# Altium PCB PCB.PcbDoc (part 2 of 2)
Units mil, origin at the board's own origin, x right, y up, seen from the top; angles counter-clockwise.
Board outline 3500 x 2500 mil, 4 copper layers (Layer 1, Layer 2, Layer 3, Layer 4), stack 61.3 mil thick; 75 components, 48 nets, 305 pads, 283 vias.
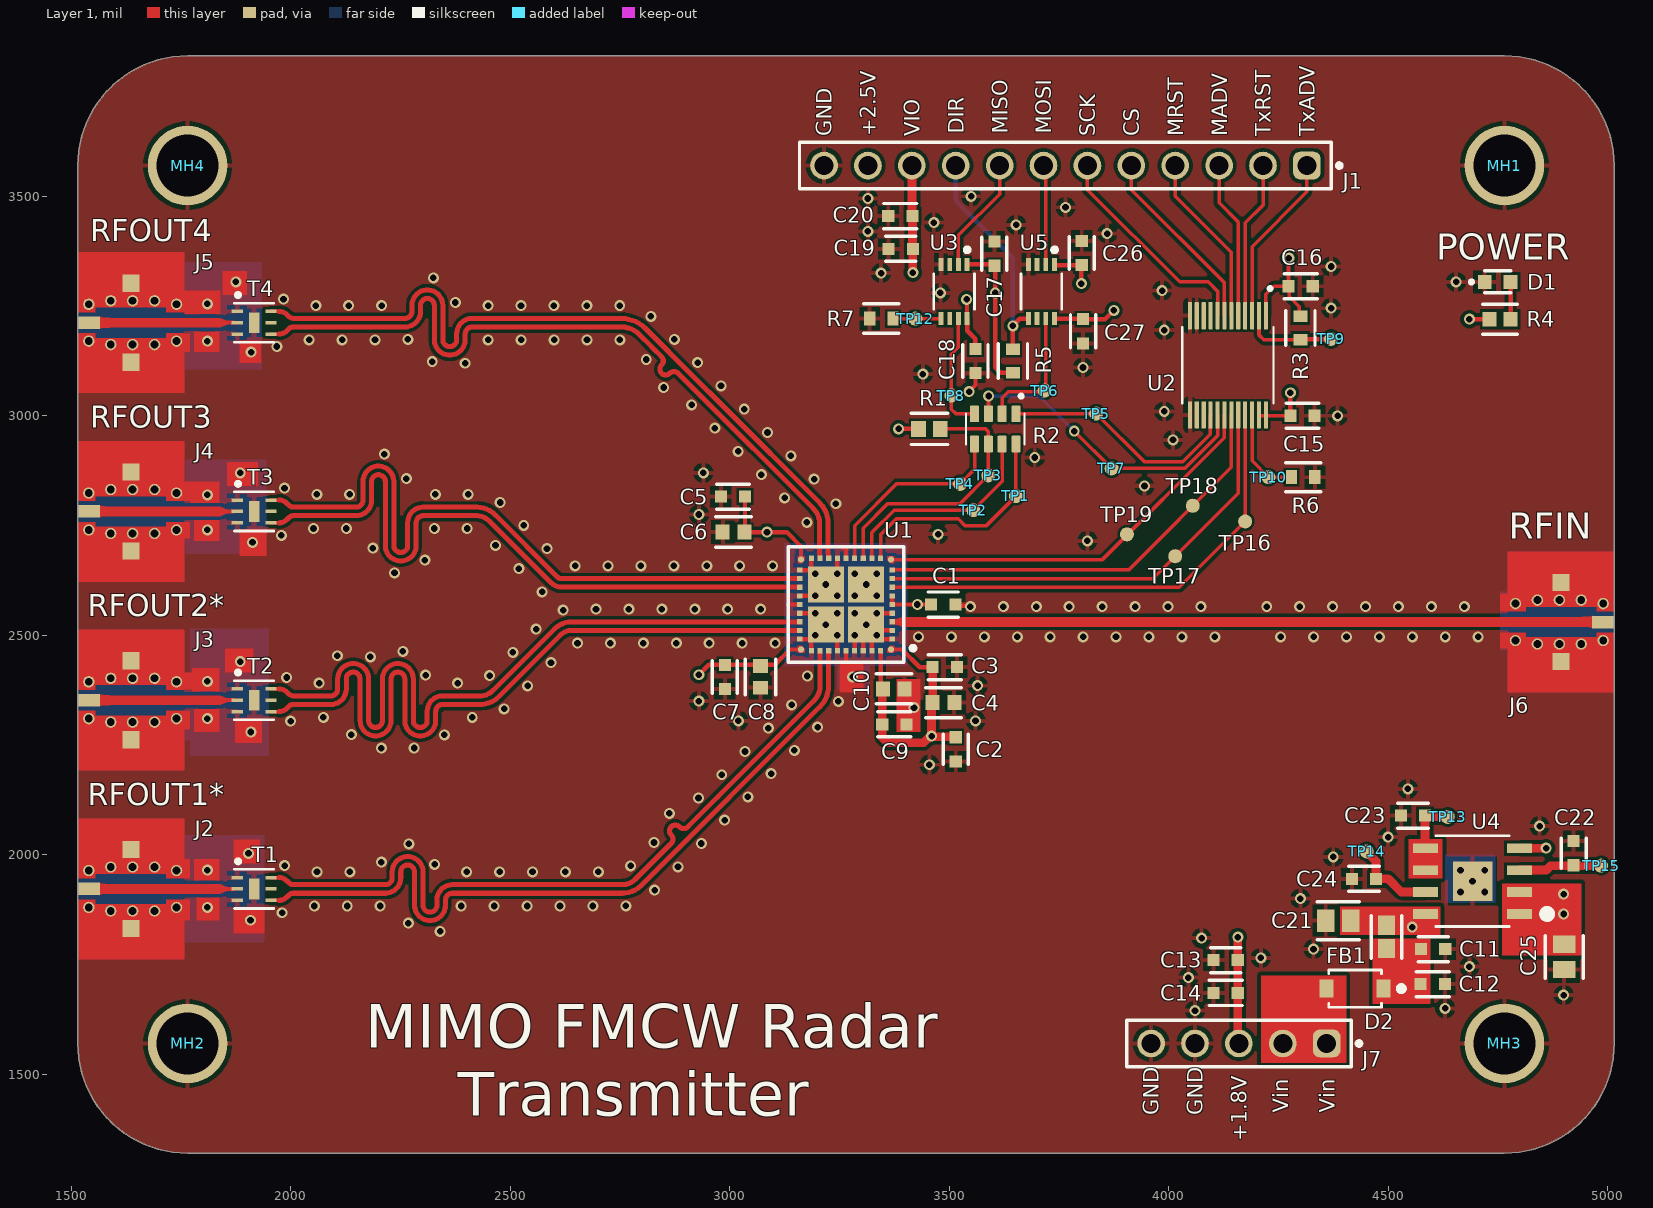
[diagram p0: Layer 1 view]

## Polygon pours and split planes (outlines as drawn) (continued)
+2.5 on Layer 3 "+2.5_L03_P002" (solid, remove dead copper, pour order 2): 1515,1570 1515,3570 cw(c1765,3570) 1765,3820 4765,3820 cw(c4765,3570) 5015,3570 5015,1570 cw(c4765,1570) 4765,1320 1765,1320 cw(c1765,1570)
GND on Layer 1 "GND_L01_P000" (solid, remove dead copper, pour order 0): 1515,1570 1515,3570 cw(c1765,3570) 1765,3820 4765,3820 cw(c4765,3570) 5015,3570 5015,1570 cw(c4765,1570) 4765,1320 1765,1320 cw(c1765,1570)

## Other copper
Layer 1:
  rectangle net GND: 3250,2370 3305,2435
  rectangle net GND: 1845,3275 1900,3330
  rectangle net GND: 1883,3120 1932.28,3172
  rectangle net GND: 1855,2840 1925,2895
  rectangle net GND: 1883,2680 1945,2742
  rectangle net GND: 1850,2415 1915,2470
  rectangle net GND: 1873,2255 1935,2312
  rectangle net GND: 1870,1980 1930,2035
  rectangle net GND: 1870,1820 1940,1875
  rectangle net GND: 1770,2801.65 1838,2850
  rectangle net GND: 1780,2715 1838,2762.35
  rectangle net GND: 1775,2371.65 1838,2425
  rectangle net GND: 1780,2280 1838,2332.35
  rectangle net GND: 1780,1941.65 1838,1990
  rectangle net GND: 1785,1850 1838,1902.35
  rectangle net GND: 1758.57,3231.65 1840,3285
  rectangle net GND: 1780,3145 1838,3192.35
  rectangle net VinF: 4390,1816.94 4619.77,1882
  rectangle net GND: 3380,2280 3435,2400
  rectangle net +2.5: 4760,1770 4940,1935
  rectangle net Vin: 4210,1525 4405,1725
  rectangle net GND: 4755,2554.25 4813,2595
  rectangle net GND: 4755,2470 4813,2505.75
  rectangle net GND: 1717,3145 1770,3187.75
  rectangle net GND: 1717,3236.25 1770,3276.76
  rectangle net GND: 1717,2806.25 1770,2850
  rectangle net GND: 1717,2720 1770,2757.75
  rectangle net GND: 1717,2376.25 1780,2415
  rectangle net GND: 1717,1850 1770,1897.75
  rectangle net GND: 1717,2285 1770,2327.75
  rectangle net GND: 1717,1946.25 1770,1990
  rectangle net NetC23_1: 4546.23,1946 4623.77,2036
  rectangle net NetC11_2: 4465,1659.5 4596.34,1808.78
Layer 2:
  rectangle net GND: 3250,2370 3310,2440
  rectangle net GND: 1780,1795 1940,2040
  rectangle net GND: 1775,2220 1945,2500
  rectangle net GND: 1775,2650 1960,2915
  rectangle net GND: 1780,3100 1940,3355
  rectangle net GND: 4755,2440 5015,2625
  rectangle net GND: 4635,1885 4750,1995
  rectangle net GND: 1515,3120 1765,3300
  rectangle net GND: 1515,2685 1780,2875
  rectangle net GND: 3125,2430 3405,2710
  rectangle net GND: 1515,2270 1770,2470
  rectangle net GND: 1515,1840 1775,2005
Layer 3:
  rectangle net +2.5: 4870,1820 4940,1940
Layer 4:
  rectangle net GND: 1735,3105 1935,3350
  rectangle net GND: 1760,2685 1945,2900
  rectangle net GND: 1750,1800 1940,2045
  rectangle net GND: 1770,2225 1950,2515
  rectangle net GND: 3245,2375 3320,2440
  rectangle net GND: 3125,2430 3405,2710
  rectangle net GND: 4755,2465.24 4795,2600
  rectangle net GND: 4630,1890 4745,2000
  rectangle net GND: 1740,3140 1775,3270
  rectangle net GND: 1740,2710 1785,2840
  rectangle net GND: 1745,2260 1790,2416.76
  rectangle net GND: 1735,1830 1790,1986.76

## Silkscreen, mask and mechanical layers (free items; w line width, h text height)
Top Overlay:
  text "DIR" at 3533,3642 h35 r90
  text "MISO" at 3633,3642 h35 r90
  text "MOSI" at 3733,3642 h35 r90
  text "GND" at 3233,3637 h35 r90
  text "+2.5V" at 3333,3637 h35 r90
  text "VIO" at 3433,3637 h35 r90
  text "SCK" at 3833,3637 h35 r90
  text "CS" at 3933,3637 h35 r90
  text "MRST" at 4033,3637 h35 r90
  text "MADV" at 4133,3637 h35 r90
  text "TxRST" at 4233,3637 h35 r90
  text "TxADV" at 4333,3637 h35 r90
  text "RFOUT4" at 1543,3398 h50
  text "POWER" at 4610,3355 h60
  text "RFOUT3" at 1543,2973 h50
  text "RFIN" at 4775,2720 h60
  text "RFOUT2*" at 1538,2543 h50
  text "RFOUT1*" at 1538,2113 h50
  text "MIMO FMCW Radar" at 2170,1560 h100
  text "Vin" at 4273,1412 h35 r90
  text "Vin" at 4378,1412 h35 r90
  text "GND" at 3978,1407 h35 r90
  text "GND" at 4078,1407 h35 r90
  text "Transmitter" at 2380,1405 h100
  text "+1.8V" at 4178,1347 h35 r90
Bottom Overlay:
  text "GND" at 3197,3627 h35 r270
  text "+2.5V" at 3297,3622 h35 r270
  text "VIO" at 3397,3622 h35 r270
  text "DIR" at 3502,3622 h35 r270
  text "SDO" at 3597,3622 h35 r270
  text "SDIO" at 3697,3622 h35 r270
  text "SCK" at 3802,3622 h35 r270
  text "CS" at 3897,3622 h35 r270
  text "MRST" at 3997,3622 h35 r270
  text "MADV" at 4102,3622 h35 r270
  text "TxRST" at 4197,3622 h35 r270
  text "TxADV" at 4297,3622 h35 r270
  text "RFOUT4" at 1783,3073 h50 r270
  text "RFOUT3" at 1783,2643 h50 r270
  text "MIMO FMCW Radar Transmitter" at 4555,2465 h100
  text "RFIN" at 4680,2420 h60 r270
  text "RFOUT2*" at 1783,2188 h50 r270
  text "RFOUT1*" at 1778,1763 h50 r270
  text "Vin" at 4247,1427 h35 r270
  text "Vin" at 4347,1427 h35 r270
  text "GND" at 3942,1422 h35 r270
  text "GND" at 4042,1422 h35 r270
  text "+1.8V" at 4137,1362 h35 r270
Mechanical 1:
  the board outline again, w10

## Text inside footprints (layer, text, board x,y; h text height)
J2: Top 3D Body "PCB EDGE" at 1498.2,2099.17 h32 r90
J3: Top 3D Body "PCB EDGE" at 1498.2,2529.17 h32 r90
J4: Top 3D Body "PCB EDGE" at 1498.2,2959.17 h32 r90
J5: Top 3D Body "PCB EDGE" at 1498.2,3389.17 h32 r90
J6: Top 3D Body "PCB EDGE" at 5031.8,2352.83 h32 r270